# EAGLE board MinSys atmega (EAGLE 7.2.0)
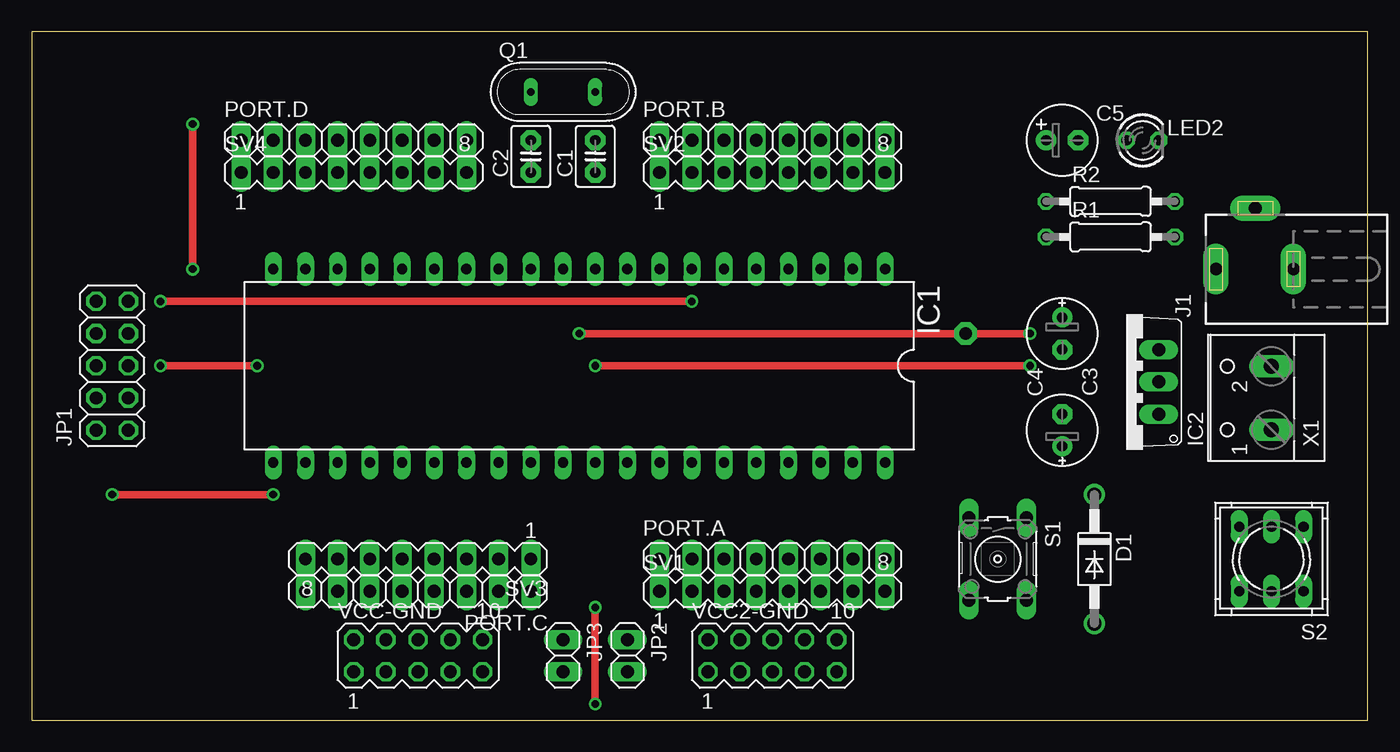
[diagram p0: board, top side]
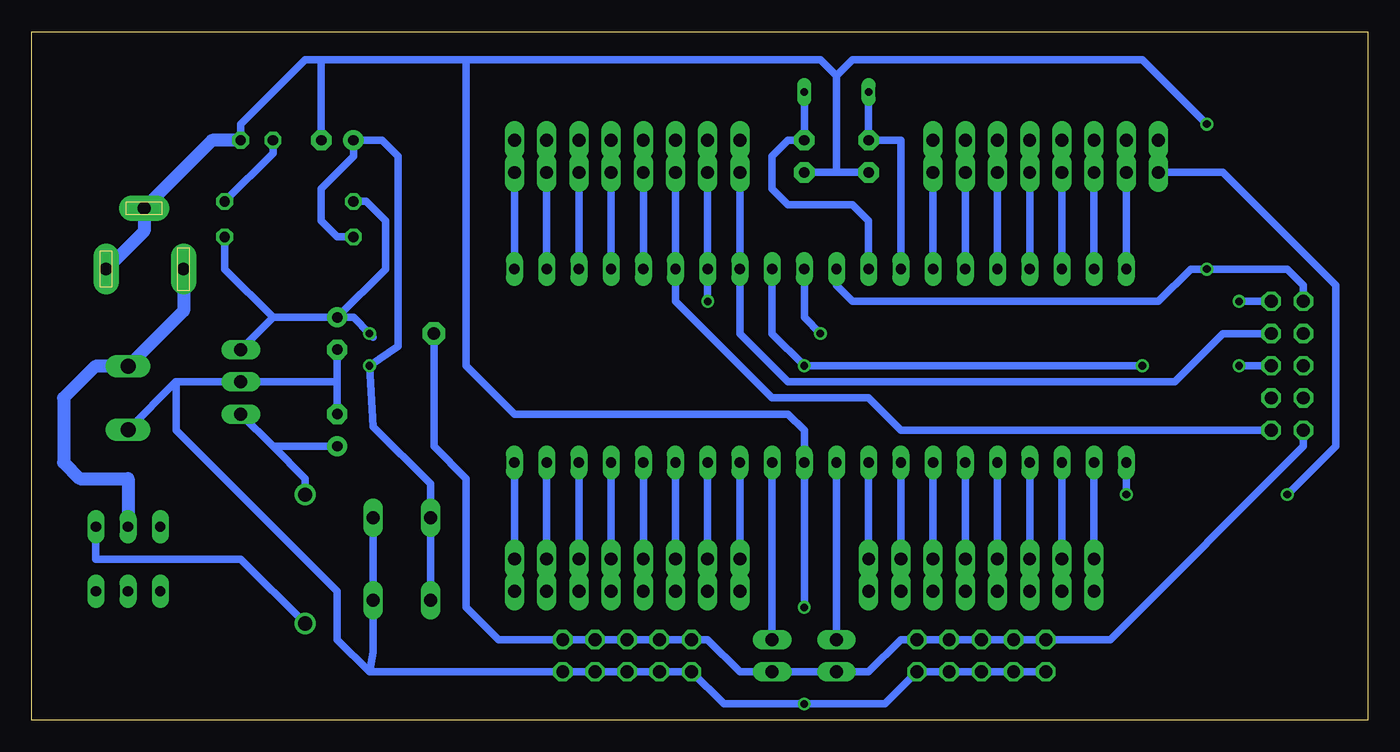
[diagram p1: board, bottom side, seen from below]

Size 105.39 x 54.28 mm. Coordinates in mm from the lower left corner, seen from the top.
Outline: 0,0 105.39,0 105.39,54.28 0,54.28 0,0
Copper layers (1*16): Top 0.035mm / dielectric 1.5mm / Bottom 0.035mm
Design rules "default": minimum track width 10mil, minimum drill 24mil, track to track 8mil, track to pad 8mil, pad to pad 8mil, via to via 8mil, smd to smd 8mil, copper to edge 40mil, drill to drill 8mil, minimum pad ring 10mil, minimum via ring 8mil, stop-mask expansion 4mil, vias tented up to drill 0mil, thermal gap 10mil

## Footprints (pad centres in the part's own frame; a part is rotated, then mirrored left to right if it is on the bottom)
C2.5-3 = drill 0.813 pad 1.6 octagon: 1 -1.27,0; 2 1.27,0
E2,5-6E = drill 0.813 pad 1.575: + -1.27,0 | drill 0.813 pad 1.575 octagon: - 1.27,0
E2,5-6 = drill 0.813 pad 1.6: + -1.27,0 | drill 0.813 pad 1.6 octagon: - 1.27,0
DO41-10 = drill 1.118: A 5.08,0; C -5.08,0
DIL40 = drill 0.813 long: 1 -24.13,-7.62; 2 -21.59,-7.62; 3 -19.05,-7.62; 4 -16.51,-7.62; 5 -13.97,-7.62; 6 -11.43,-7.62; 7 -8.89,-7.62; 8 -6.35,-7.62; 9 -3.81,-7.62; 10 -1.27,-7.62; 11 1.27,-7.62; 12 3.81,-7.62; 13 6.35,-7.62; 14 8.89,-7.62; 15 11.43,-7.62; 16 13.97,-7.62; 17 16.51,-7.62; 18 19.05,-7.62; 19 21.59,-7.62; 20 24.13,-7.62; 21 24.13,7.62; 22 21.59,7.62; 23 19.05,7.62; 24 16.51,7.62; 25 13.97,7.62; 26 11.43,7.62; 27 8.89,7.62; 28 6.35,7.62; 29 3.81,7.62; 30 1.27,7.62; 31 -1.27,7.62; 32 -3.81,7.62; 33 -6.35,7.62; 34 -8.89,7.62; 35 -11.43,7.62; 36 -13.97,7.62; 37 -16.51,7.62; 38 -19.05,7.62; 39 -21.59,7.62; 40 -24.13,7.62
TO220V = drill 1.016 long: 1 -2.54,-2.54; 2 0,-2.54; 3 2.54,-2.54
DCJ0202 = drill 1 pad 2 long: 1 0,3.1; 2 4.8,0; 3 0,-3
2X05 = drill 1.016 octagon: 1 -5.08,-1.27; 2 -5.08,1.27; 3 -2.54,-1.27; 4 -2.54,1.27; 5 0,-1.27; 6 0,1.27; 7 2.54,-1.27; 8 2.54,1.27; 9 5.08,-1.27; 10 5.08,1.27
1X02 = drill 1.016 long: 1 -1.27,0; 2 1.27,0
LED3MM = drill 0.813 octagon: A -1.27,0; K 1.27,0
1X08 = drill 1.016 long: 1 -8.89,0; 2 -6.35,0; 3 -3.81,0; 4 -1.27,0; 5 1.27,0; 6 3.81,0; 7 6.35,0; 8 8.89,0
QS = drill 0.61 long: 1 -2.54,0; 2 2.54,0
0207/10 = drill 0.813 octagon: 1 -5.08,0; 2 5.08,0
B3F-10XX = drill 1.016 long: 1 -3.251,2.261; 2 3.251,2.261; 3 -3.251,-2.261; 4 3.251,-2.261
9077-2 = drill 0.813 long: 1 -2.54,2.54; 2 0,2.54; 3 2.54,2.54; 4 -2.54,-2.54; 5 0,-2.54; 6 2.54,-2.54
MA08-1 = drill 1.016 long: 1 -8.89,0; 2 -6.35,0; 3 -3.81,0; 4 -1.27,0; 5 1.27,0; 6 3.81,0; 7 6.35,0; 8 8.89,0
MA05-2 = drill 1.016 octagon: 1 -5.08,-1.27; 2 -5.08,1.27; 3 -2.54,-1.27; 4 -2.54,1.27; 5 0,-1.27; 6 0,1.27; 7 2.54,-1.27; 8 2.54,1.27; 9 5.08,-1.27; 10 5.08,1.27
W237-102 = drill 1.194 long: 1 -2.5,-1.27; 2 2.5,-1.27

## Placement (x,y rotation side)
C1  33p  [C2.5-3]  44.45,44.45 90 top
C2  33p  [C2.5-3]  39.37,44.45 90 top
C3  [E2,5-6E]  81.28,30.48 270 top
C4  [E2,5-6E]  81.28,22.86 90 top
C5  [E2,5-6]  81.28,45.72 0 top
D1  1N4004  [DO41-10]  83.82,12.7 270 top
IC1  MEGA16-P  [DIL40]  43.18,27.94 180 top
IC2  7805TV  [TO220V]  86.36,26.67 90 top
J1  DCJ0202  [DCJ0202]  96.52,35.56 90 top
JP1  [2X05]  6.35,27.94 90 top
JP2  [1X02]  46.99,5.08 270 top
JP3  [1X02]  41.91,5.08 270 top
LED2  [LED3MM]  87.63,45.72 0 top
PORT.A  [1X08]  58.42,12.7 0 top
PORT.B  [1X08]  58.42,45.72 0 top
PORT.C  [1X08]  30.48,10.16 180 top
PORT.D  [1X08]  25.4,45.72 0 top
Q1  11.0596  [QS]  41.91,49.53 0 top
R1  10k  [0207/10]  85.09,38.1 0 top
R2  560  [0207/10]  85.09,40.89 0 top
S1  [B3F-10XX]  76.2,12.7 270 top
S2  9077-2  [9077-2]  97.79,12.7 180 top
SV1  [MA08-1]  58.42,10.16 0 top
SV2  [MA08-1]  58.42,43.18 0 top
SV3  [MA08-1]  30.48,12.7 180 top
SV4  [MA08-1]  25.4,43.18 0 top
VCC2-GND  [MA05-2]  58.42,5.08 0 top
VCC-GND  [MA05-2]  30.48,5.08 0 top
X1  [W237-102]  96.52,25.4 90 top

## Library data of the parts
C1 C2 = capacitor-wima
C3-C5 R1 = rcl
D1 = diode
IC1 = atmel; MPN: ATMEGA16-16PU; OC_FARNELL: 9171142; OC_NEWARK: 01M6885
IC2 = linear
J1 = con-jack; OC_FARNELL: unknown; OC_NEWARK: unknown
JP1-JP3 PORT.A PORT.B PORT.C PORT.D = pinhead
LED2 = led
Q1 = special
R2 = resistor
S1 = switch-omron; MPN: B3F-1000; OC_FARNELL: 176432; OC_NEWARK: 36M3542
S2 = switch-misc
SV1-SV4 VCC2-GND VCC-GND = con-lstb; OC_FARNELL: unknown; OC_NEWARK: unknown
X1 = con-wago-500; MPN: 237-102; OC_FARNELL: unknown; OC_NEWARK: 70K9898

## Nets
GND: C1.1 C2.1 C3.- C4.- C5.- IC1.11 IC1.31 IC2.2 J1.2 J1.3 JP1.10 LED2.K S1.1 S1.2 VCC2-GND.1 VCC2-GND.3 VCC2-GND.5 VCC2-GND.7 VCC2-GND.9 VCC-GND.1 VCC-GND.3 VCC-GND.5 VCC-GND.7 VCC-GND.9 X1.1
MISO: IC1.7 JP1.9 PORT.B.2 SV2.2
MOSI: IC1.6 JP1.1 PORT.B.3 SV2.3
N$1: IC1.33 PORT.A.1 SV1.1
N$2: D1.A S2.4
N$3: IC1.34 PORT.A.2 SV1.2
N$4: IC1.32 JP2.1
N$5: IC1.30 JP3.1
N$9: C1.2 IC1.12 Q1.2
N$10: C2.2 IC1.13 Q1.1
N$36: C4.+ D1.C IC2.1
N$41: LED2.A R2.2
P02: IC1.35 PORT.A.3 SV1.3
P03: IC1.36 PORT.A.4 SV1.4
P04: IC1.37 PORT.A.5 SV1.5
P05: IC1.38 PORT.A.6 SV1.6
P06: IC1.39 PORT.A.7 SV1.7
P07: IC1.40 PORT.A.8 SV1.8
P10: IC1.14 PORT.D.8 SV4.8
P11: IC1.15 PORT.D.7 SV4.7
P12: IC1.16 PORT.D.6 SV4.6
P13: IC1.17 PORT.D.5 SV4.5
P14: IC1.18 PORT.D.4 SV4.4
P15: IC1.19 PORT.D.3 SV4.3
P16: IC1.20 PORT.D.2 SV4.2
P17: IC1.21 PORT.D.1 SV4.1
P23: IC1.5 PORT.B.4 SV2.4
P24: IC1.4 PORT.B.5 SV2.5
P25: IC1.3 PORT.B.6 SV2.6
P26: IC1.2 PORT.B.7 SV2.7
P27: IC1.1 PORT.B.8 SV2.8
P30: IC1.22 PORT.C.8 SV3.8
P31: IC1.23 PORT.C.7 SV3.7
P32: IC1.24 PORT.C.6 SV3.6
P33: IC1.25 PORT.C.5 SV3.5
P34: IC1.26 PORT.C.4 SV3.4
P35: IC1.27 PORT.C.3 SV3.3
P36: IC1.28 PORT.C.2 SV3.2
P37: IC1.29 PORT.C.1 SV3.1
RST: C5.+ IC1.9 JP1.5 R1.1 S1.3 S1.4
SCK: IC1.8 JP1.7 PORT.B.1 SV2.1
VCC: C3.+ IC1.10 IC2.3 JP1.2 JP2.2 JP3.2 R1.2 R2.1 VCC2-GND.2 VCC2-GND.4 VCC2-GND.6 VCC2-GND.8 VCC2-GND.10 VCC-GND.2 VCC-GND.4 VCC-GND.6 VCC-GND.8 VCC-GND.10
VIN: J1.1 S2.5 X1.2

## Tracks (layer width: path | path; a pad name or v marks a point on that pad's centre or on a via)
GND  (via drill 0.6)
  Top 0.61: v44.45,8.89 v44.45,1.27 | v12.7,46.99 v12.7,35.56
  Bottom 0.61: C2.1 41.91,43.18 | C3.- 81.28,26.67 | 81.28,26.67 C4.- | 81.28,26.67 IC2.2 93.98,26.67 | 93.98,26.67 94.02,26.67 X1.1 | VCC-GND.1 VCC-GND.3 VCC-GND.5 VCC-GND.7 VCC-GND.9 38.1,1.27 v44.45,1.27 50.8,1.27 VCC2-GND.1 VCC2-GND.3 VCC2-GND.5 VCC2-GND.7 VCC2-GND.9 78.74,3.81 | C1.1 41.91,43.18 | 41.91,50.8 43.18,52.07 71.12,52.07 | 71.12,52.07 82.55,52.07 | 82.55,52.07 83.82,52.07 88.9,46.99 LED2.K | 71.12,52.07 71.12,27.94 67.31,24.13 45.72,24.13 44.45,22.86 IC1.31 v44.45,8.89 | IC1.11 41.91,34.29 40.64,33.02 16.51,33.02 13.97,35.56 v12.7,35.56 6.35,35.56 5.08,34.29 JP1.10 | 93.98,26.67 93.98,22.86 81.28,10.16 81.28,6.35 78.74,3.81 | 41.91,43.18 41.91,50.8 | 41.91,50.8 40.64,52.07 17.78,52.07 v12.7,46.99 | C5.- 82.55,52.07 | S1.1 S1.2 78.46,5.36 78.74,3.81
  Bottom 1.016: J1.3 96.52,38.56 J1.2 91.16,45.72 LED2.K
MISO  (via drill 0.6)
  Top 0.61: v10.16,33.02 v52.07,33.02
  Bottom 0.61: SV2.2 IC1.7 v52.07,33.02 | JP1.9 v10.16,33.02
  Bottom 0.813: PORT.B.2 SV2.2
MOSI
  Bottom 0.61: SV2.3 IC1.6 54.61,33.02 46.99,25.4 39.37,25.4 36.83,22.86 JP1.1
  Bottom 0.813: SV2.3 PORT.B.3
N$1
  Bottom 0.61: SV1.1 PORT.A.1 IC1.33
N$2
  Bottom 0.61: D1.A 88.9,12.7 100.33,12.7 S2.4
N$3
  Bottom 0.61: SV1.2 PORT.A.2 IC1.34
N$4
  Bottom 0.61: JP2.1 IC1.32
N$5
  Bottom 0.61: IC1.30 JP3.1
N$9
  Bottom 0.61: Q1.2 C1.2 45.72,45.72 46.99,44.45 46.99,41.91 45.72,40.64 40.64,40.64 39.37,39.37 IC1.12
N$10
  Bottom 0.61: Q1.1 C2.2 36.83,45.72 IC1.13
N$36
  Bottom 0.61: C4.+ 86.36,21.59 | 86.36,21.59 IC2.1 | D1.C 83.82,19.05 86.36,21.59
N$41
  Bottom 0.61: LED2.A 86.36,44.7 R2.2
P02
  Bottom 0.61: SV1.3 PORT.A.3 IC1.35
P03
  Bottom 0.61: SV1.4 PORT.A.4 IC1.36
P04
  Bottom 0.61: SV1.5 PORT.A.5 IC1.37
P05
  Bottom 0.61: SV1.6 PORT.A.6 IC1.38
P06
  Bottom 0.61: SV1.7 PORT.A.7 IC1.39
P07
  Bottom 0.61: SV1.8 PORT.A.8 IC1.40
P10
  Bottom 0.61: SV4.8 IC1.14
  Bottom 0.813: SV4.8 PORT.D.8
P11
  Bottom 0.61: IC1.15 SV4.7
  Bottom 0.813: PORT.D.7 SV4.7
P12
  Bottom 0.61: SV4.6 IC1.16
  Bottom 0.813: SV4.6 PORT.D.6
P13
  Bottom 0.61: IC1.17 SV4.5
  Bottom 0.813: PORT.D.5 SV4.5
P14
  Bottom 0.61: SV4.4 IC1.18
  Bottom 0.813: SV4.4 PORT.D.4
P15
  Bottom 0.61: IC1.19 SV4.3 PORT.D.3
P16
  Bottom 0.61: PORT.D.2 SV4.2 IC1.20
P17  (via drill 0.6)
  Top 0.61: v6.35,17.78 v19.05,17.78
  Bottom 0.61: PORT.D.1 SV4.1 11.43,43.18 2.54,34.29 2.54,21.59 v6.35,17.78 | v19.05,17.78 IC1.21
P23
  Bottom 0.61: IC1.5 SV2.4
  Bottom 0.813: PORT.B.4 SV2.4
P24
  Bottom 0.61: SV2.5 IC1.4
  Bottom 0.813: SV2.5 PORT.B.5
P25
  Bottom 0.61: IC1.3 SV2.6
  Bottom 0.813: PORT.B.6 SV2.6
P26
  Bottom 0.61: SV2.7 IC1.2
  Bottom 0.813: SV2.7 PORT.B.7
P27
  Bottom 0.61: IC1.1 SV2.8
  Bottom 0.813: PORT.B.8 SV2.8
P30
  Bottom 0.61: IC1.22 SV3.8
  Bottom 0.813: SV3.8 PORT.C.8
P31
  Bottom 0.61: SV3.7 IC1.23
  Bottom 0.813: PORT.C.7 SV3.7
P32
  Bottom 0.61: IC1.24 SV3.6
  Bottom 0.813: SV3.6 PORT.C.6
P33
  Bottom 0.61: SV3.5 IC1.25
  Bottom 0.813: PORT.C.5 SV3.5
P34
  Bottom 0.61: IC1.26 SV3.4
  Bottom 0.813: SV3.4 PORT.C.4
P35
  Bottom 0.61: SV3.3 IC1.27
  Bottom 0.813: PORT.C.3 SV3.3
P36
  Bottom 0.61: IC1.28 SV3.2
  Bottom 0.813: SV3.2 PORT.C.2
P37
  Bottom 0.61: SV3.1 IC1.29
  Bottom 0.813: PORT.C.1 SV3.1
RST  (via drill 0.6)
  Top 0.61: v17.78,27.94 v10.16,27.94 | v78.74,27.94 v44.45,27.94
  Bottom 0.61: IC1.9 46.99,30.48 v44.45,27.94 v17.78,27.94 | v10.16,27.94 JP1.5 | R1.1 81.28,38.1 82.55,39.37 82.55,41.91 80.01,44.45 C5.+ 77.75,45.72 76.48,44.45 76.48,29.49 v78.74,27.94 78.46,23.14 73.94,18.62 S1.3 S1.4
SCK
  Bottom 0.61: SV2.1 IC1.8 49.53,30.48 45.72,26.67 15.24,26.67 11.43,30.48 JP1.7
  Bottom 0.813: SV2.1 PORT.B.1
VCC  (via drill 0.6, 1 pad 1.78)
  Top 0.61: v43.18,30.48 v73.66,30.48 v78.74,30.48
  Bottom 0.61: JP1.2 5.08,21.59 20.32,6.35 VCC-GND.2 VCC-GND.4 VCC-GND.6 VCC-GND.8 VCC-GND.10 36.83,6.35 39.37,3.81 JP3.2 JP2.2 49.53,3.81 52.07,6.35 VCC2-GND.2 | VCC2-GND.10 VCC2-GND.8 VCC2-GND.6 VCC2-GND.4 VCC2-GND.2 | C3.+ 86.36,31.75 | 86.36,31.75 IC2.3 | R2.1 78.99,40.89 77.47,39.37 77.47,35.56 C3.+ | 78.46,30.2 v78.74,30.48 80.01,31.75 C3.+ | IC1.10 44.45,31.75 v43.18,30.48 | R1.2 90.17,35.56 86.36,31.75 | VCC2-GND.2 68.58,6.35 71.12,8.89 71.12,19.05 73.66,21.59 v73.66,30.48
VIN
  Bottom 1.016: J1.1 93.42,32.27 X1.2 100.37,27.9 102.87,25.4 102.87,20.32 101.6,19.05 97.79,19.05 S2.5